# EAGLE board Output_Shield (EAGLE 5.06)
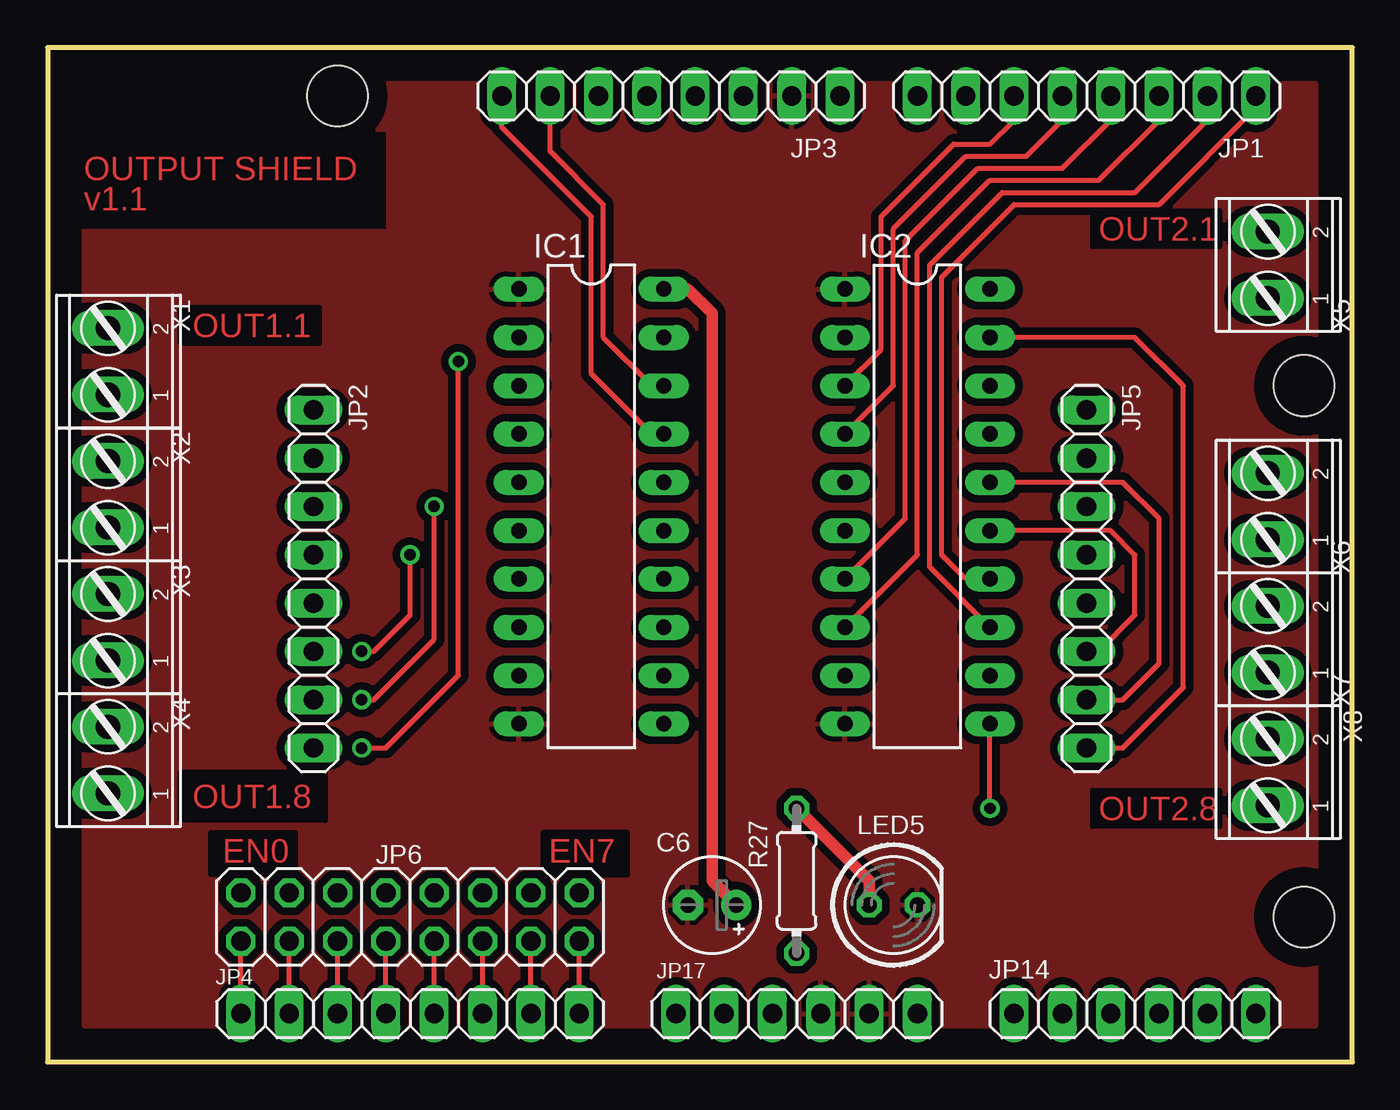
[diagram p0: board, top side]
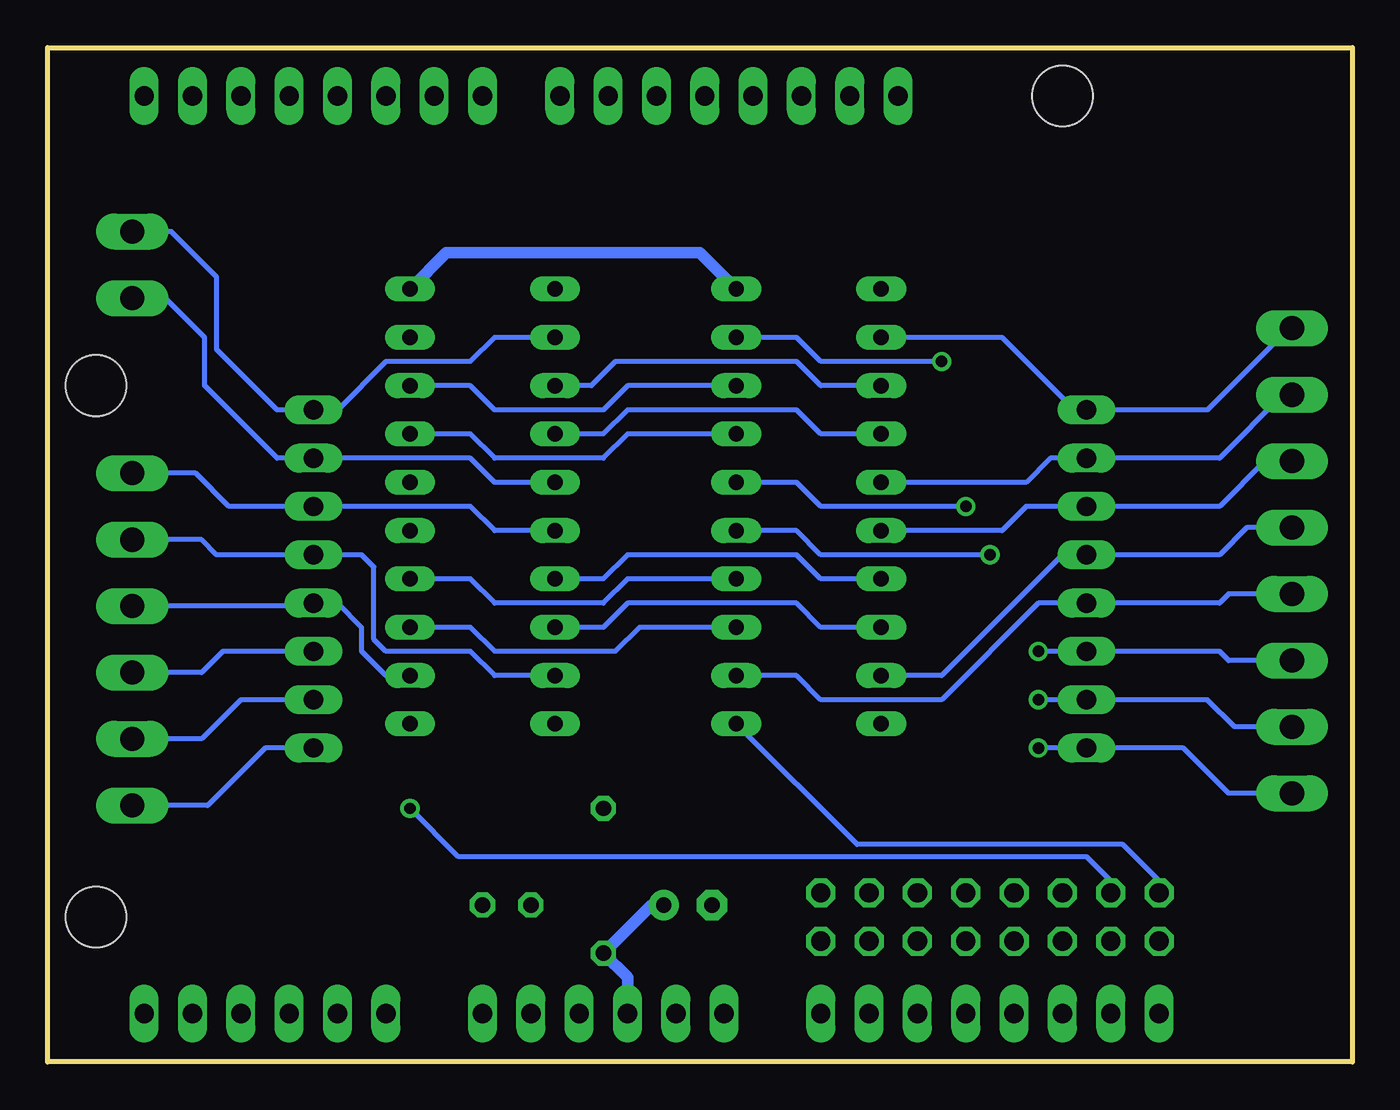
[diagram p1: board, bottom side, seen from below]

Size 68.58 x 53.34 mm. Coordinates in mm from the lower left corner, seen from the top.
Outline: 0,0 68.58,0 68.58,53.34 0,53.34 0,0
Copper layers (1*16): Top 0.035mm / dielectric 1.5mm / Bottom 0.035mm
Design rules "default *": minimum track width 8mil, minimum drill 20mil, track to track 16mil, track to pad 16mil, pad to pad 8mil, via to via 8mil, smd to smd 8mil, copper to edge 40mil, drill to drill 8mil, minimum pad ring 10mil, minimum via ring 8mil, stop-mask expansion 4mil, vias tented up to drill 0mil, thermal gap 10mil
Holes 3.2 mm at 66.04,35.56 66.04,7.62 15.24,50.8
tRestrict: area 0.6,43.8 to 17.8,48.9; area 8.6,9.8 to 13,12.1; area 26,9.8 to 30.5,12.1; area 7,12.7 to 14.6,15.2; area 7,37.8 to 14.3,39.7; area 54.9,42.9 to 61.6,44.8; area 54.9,12.4 to 61.6,14.3

## Footprints (pad centres in the part's own frame; a part is rotated, then mirrored left to right if it is on the bottom)
E2,5-5 = drill 0.813 pad 1.6 round: + -1.27,0 | drill 0.813 pad 1.6 octagon: - 1.27,0
DIL20 = drill 0.813 long: 1 -11.43,-3.81; 2 -8.89,-3.81; 3 -6.35,-3.81; 4 -3.81,-3.81; 5 -1.27,-3.81; 6 1.27,-3.81; 7 3.81,-3.81; 8 6.35,-3.81; 9 8.89,-3.81; 10 11.43,-3.81; 11 11.43,3.81; 12 8.89,3.81; 13 6.35,3.81; 14 3.81,3.81; 15 1.27,3.81; 16 -1.27,3.81; 17 -3.81,3.81; 18 -6.35,3.81; 19 -8.89,3.81; 20 -11.43,3.81
1X08 = drill 1.016 long: 1 -8.89,0; 2 -6.35,0; 3 -3.81,0; 4 -1.27,0; 5 1.27,0; 6 3.81,0; 7 6.35,0; 8 8.89,0
2X08 = drill 1.016 octagon: 1 -8.89,-1.27; 2 -8.89,1.27; 3 -6.35,-1.27; 4 -6.35,1.27; 5 -3.81,-1.27; 6 -3.81,1.27; 7 -1.27,-1.27; 8 -1.27,1.27; 9 1.27,-1.27; 10 1.27,1.27; 11 3.81,-1.27; 12 3.81,1.27; 13 6.35,-1.27; 14 6.35,1.27; 15 8.89,-1.27; 16 8.89,1.27
1X06 = drill 1.016 long: 1 -6.35,0; 2 -3.81,0; 3 -1.27,0; 4 1.27,0; 5 3.81,0; 6 6.35,0
LED5MM = drill 0.813 octagon: A -1.27,0; K 1.27,0
0204/7 = drill 0.813 octagon: 1 -3.81,0; 2 3.81,0
AK550/2 = drill 1.27 long: 1 -1.75,0; 2 1.75,0

## Placement (x,y rotation side)
C6  [E2,5-5]  34.92,8.26 180 top
IC1  74LS374N  [DIL20]  28.57,29.21 270 top
IC2  74LS374N  [DIL20]  45.72,29.21 270 top
JP1  SHIELD_J1  [1X08]  54.61,50.8 0 top
JP2  OUT1  [1X08]  13.97,25.4 270 top
JP3  SHIELD_J3  [1X08]  32.77,50.8 0 top
JP4  IO_J1  [1X08]  19.05,2.54 0 top
JP5  OUT2  [1X08]  54.61,25.4 270 top
JP6  [2X08]  19.05,7.62 180 top
JP14  SHIELD_J2  [1X06]  57.15,2.54 0 top
JP17  POWER  [1X06]  39.37,2.54 0 top
LED5  POWER  [LED5MM]  44.45,8.26 0 top
R27  220  [0204/7]  39.37,9.53 270 top
X1  OUT1  [AK550/2]  3.17,36.83 90 top
X2  OUT2  [AK550/2]  3.17,29.84 90 top
X3  OUT3  [AK550/2]  3.17,22.86 90 top
X4  OUT4  [AK550/2]  3.17,15.88 90 top
X5  OUT5  [AK550/2]  64.14,41.91 90 top
X6  OUT6  [AK550/2]  64.14,29.21 90 top
X7  OUT7  [AK550/2]  64.14,22.23 90 top
X8  OUT8  [AK550/2]  64.14,15.24 90 top

## Library data of the parts
C6 = rcl
IC1 IC2 = 74xx-us
JP1-JP6 JP14 JP17 = pinhead
LED5 = led
R27 = resistor
X1-X8 = con-ptr500+_v5

## Nets
AREF: JP3.8
D0: IC1.3 IC2.3 JP1.3
D1: IC1.4 IC2.4 JP1.4
D2: IC1.7 IC2.7 JP1.5
D3: IC1.8 IC2.8 JP1.6
D4: IC1.13 IC2.13 JP1.7
D5: IC1.14 IC2.14 JP1.8
D6: IC1.17 IC2.17 JP3.1
D7: IC1.18 IC2.18 JP3.2
EN0: JP4.1 JP6.16
EN1: JP4.2 JP6.14
EN2: JP4.3 JP6.12
EN3: JP4.4 JP6.10
EN4: JP4.5 JP6.8
EN5: JP4.6 JP6.6
EN6: JP4.7 JP6.4
EN7: JP4.8 JP6.2
EN_OUT1: IC1.11 JP6.15
EN_OUT2: IC2.11 JP6.13
GND: C6.- IC1.1 IC1.10 IC2.1 IC2.10 JP3.7 JP17.4 JP17.5 LED5.K
MISO: JP3.5
MOSI: JP3.4
N$39: LED5.A R27.1
OUT1.1: IC1.2 JP2.1 X1.2
OUT1.2: IC1.5 JP2.2 X1.1
OUT1.3: IC1.6 JP2.3 X2.2
OUT1.4: IC1.9 JP2.4 X2.1
OUT1.5: IC1.12 JP2.5 X3.2
OUT1.6: IC1.15 JP2.6 X3.1
OUT1.7: IC1.16 JP2.7 X4.2
OUT1.8: IC1.19 JP2.8 X4.1
OUT2.1: IC2.2 JP5.1 X5.2
OUT2.2: IC2.5 JP5.2 X5.1
OUT2.3: IC2.6 JP5.3 X6.2
OUT2.4: IC2.9 JP5.4 X6.1
OUT2.5: IC2.12 JP5.5 X7.2
OUT2.6: IC2.15 JP5.6 X7.1
OUT2.7: IC2.16 JP5.7 X8.2
OUT2.8: IC2.19 JP5.8 X8.1
PC0: JP14.1
PC1: JP14.2
PC2: JP14.3
PC3: JP14.4
PC4: JP14.5
PC5: JP14.6
RESET: JP17.1
RXD: JP1.1
SCK: JP3.6
SS: JP3.3
TXD: JP1.2
VCC: C6.+ IC1.20 IC2.20 JP17.3 R27.2
VCC30: JP17.2
VIN: JP17.6

## Tracks (layer width: path | path; a pad name or v marks a point on that pad's centre or on a via)
D0
  Top 0.254: IC2.3 43.81,37.47 43.81,44.45 47.62,48.26 49.53,48.26 50.8,49.53 JP1.3
  Bottom 0.254: IC2.3 40.01,35.56 38.73,36.83 29.21,36.83 27.94,35.56 IC1.3
D1
  Top 0.254: IC2.4 44.45,35.56 44.45,43.81 48.26,47.62 51.44,47.62 53.34,49.53 JP1.4
  Bottom 0.254: IC2.4 39.37,33.02 38.1,34.29 29.21,34.29 27.94,33.02 IC1.4
D2
  Top 0.254: IC2.7 45.09,28.57 45.09,43.18 48.9,46.99 53.34,46.99 55.88,49.53 JP1.5
  Bottom 0.254: IC2.7 39.37,25.4 38.1,26.67 29.21,26.67 27.94,25.4 IC1.7
D3
  Top 0.254: IC2.8 45.72,26.67 45.72,42.55 49.53,46.35 55.24,46.35 58.42,49.53 JP1.6
  Bottom 0.254: IC2.8 39.37,22.86 38.1,24.13 29.21,24.13 27.94,22.86 IC1.8
D4
  Top 0.254: JP1.7 60.96,49.53 57.15,45.72 50.16,45.72 46.35,41.91 46.35,26.04 IC2.13
  Bottom 0.254: IC2.13 46.35,22.86 45.09,21.59 38.73,21.59 37.47,22.86 IC1.13
D5
  Top 0.254: JP1.8 63.5,50.16 58.42,45.09 50.8,45.09 46.99,41.27 46.99,26.67 48.26,25.4 IC2.14
  Bottom 0.254: IC1.14 38.1,25.4 39.37,24.13 45.09,24.13 46.35,25.4 IC2.14
D6
  Top 0.254: JP3.1 23.88,49.15 28.57,44.45 28.57,36.2 31.75,33.02 IC1.17
  Bottom 0.254: IC2.17 46.35,33.02 45.09,31.75 39.37,31.75 38.1,33.02 IC1.17
D7
  Top 0.254: JP3.2 26.42,47.88 29.21,45.09 29.21,38.1 31.75,35.56 IC1.18
  Bottom 0.254: IC2.18 46.35,35.56 45.09,34.29 39.37,34.29 38.1,35.56 IC1.18
EN0
  Top 0.254: JP4.1 JP6.16
EN1
  Top 0.254: JP4.2 JP6.14
EN2
  Top 0.254: JP4.3 JP6.12
EN3
  Top 0.254: JP4.4 JP6.10
EN4
  Top 0.254: JP4.5 JP6.8
EN5
  Top 0.254: JP4.6 JP6.6
EN6
  Top 0.254: JP4.7 JP6.4
EN7
  Top 0.254: JP4.8 JP6.2
EN_OUT1
  Bottom 0.254: JP6.15 10.16,9.53 12.06,11.43 26.04,11.43 IC1.11
EN_OUT2  (via drill 0.6)
  Top 0.254: v49.53,13.34 IC2.11
  Bottom 0.254: JP6.13 12.7,9.53 13.97,10.79 46.99,10.79 v49.53,13.34
GND
  pour Top: 1.91,1.91 66.67,1.91 66.67,51.44 1.91,51.44
N$39
  Top 0.61: R27.1 43.18,9.53 LED5.A
OUT1.1
  Bottom 0.254: X1.2 3.33,38.58 7.62,34.29 JP2.1 14.61,34.29 18.41,38.1 IC1.2
OUT1.2
  Bottom 0.254: IC1.5 17.14,30.48 15.88,31.75 JP2.2 6.99,31.75 3.65,35.08 X1.1
OUT1.3
  Bottom 0.254: IC1.6 18.41,27.94 17.14,29.21 JP2.3 6.99,29.21 4.6,31.59 X2.2
OUT1.4
  Bottom 0.254: IC1.9 21.59,20.32 15.24,26.67 JP2.4 6.99,26.67 5.56,28.09 X2.1
OUT1.5
  Bottom 0.254: IC1.12 29.21,20.32 27.94,19.05 21.59,19.05 16.51,24.13 JP2.5 6.99,24.13 6.5,24.61 X3.2
OUT1.6  (via drill 0.6)
  Top 0.254: v16.51,21.59 17.14,21.59 19.05,23.5 v19.05,26.67
  Bottom 0.254: IC1.15 29.21,27.94 27.94,26.67 v19.05,26.67 | X3.1 6.5,21.11 6.99,21.59 JP2.6 v16.51,21.59
OUT1.7  (via drill 0.6)
  Top 0.254: v16.51,19.05 17.14,19.05 20.32,22.23 v20.32,29.21
  Bottom 0.254: IC1.16 29.21,30.48 27.94,29.21 v20.32,29.21 | X4.2 6.2,17.62 7.62,19.05 JP2.7 v16.51,19.05
OUT1.8  (via drill 0.6)
  Top 0.254: v16.51,16.51 17.78,16.51 21.59,20.32 v21.59,36.83
  Bottom 0.254: IC1.19 29.21,38.1 27.94,36.83 v21.59,36.83 | X4.1 6.5,14.12 8.89,16.51 JP2.8 v16.51,16.51
OUT2.1
  Bottom 0.254: X5.2 62.08,43.66 59.69,41.27 59.69,37.47 56.52,34.29 JP5.1 53.34,34.29 50.8,36.83 46.35,36.83 45.09,38.1 IC2.2
OUT2.2
  Bottom 0.254: X5.1 62.38,40.16 60.33,38.1 60.33,35.56 56.52,31.75 JP5.2 46.35,31.75 45.09,30.48 IC2.5
OUT2.3
  Bottom 0.254: X6.2 60.8,30.96 59.05,29.21 JP5.3 46.35,29.21 45.09,27.94 IC2.6
OUT2.4
  Bottom 0.254: X6.1 60.48,27.46 59.69,26.67 JP5.4 52.07,26.67 51.44,26.04 51.44,22.23 50.8,21.59 46.35,21.59 45.09,20.32 IC2.9
OUT2.5
  Bottom 0.254: X7.2 54.77,23.98 JP5.5 53.34,24.13 52.07,22.86 52.07,21.59 50.8,20.32 IC2.12
OUT2.6
  Top 0.254: IC2.15 55.88,27.94 57.15,26.67 57.15,23.5 55.24,21.59 JP5.6
  Bottom 0.254: X7.1 60.49,20.48 59.37,21.59 JP5.6
OUT2.7
  Top 0.254: IC2.16 56.52,30.48 58.42,28.57 58.42,20.95 56.52,19.05 JP5.7
  Bottom 0.254: X8.2 60.48,16.99 58.42,19.05 JP5.7
OUT2.8
  Top 0.254: IC2.19 57.15,38.1 59.69,35.56 59.69,19.68 56.52,16.51 JP5.8
  Bottom 0.254: X8.1 60.17,13.49 57.15,16.51 JP5.8
VCC
  Top 0.61: IC1.20 33.66,40.64 34.92,39.37 34.92,9.53 C6.+
  Bottom 0.61: IC2.20 47.62,42.55 34.29,42.55 IC1.20 | C6.+ 36.83,8.26 R27.2 38.1,4.45 JP17.3

## Text on the board
Top: OUTPUT SHIELD | v1.1 | OUT2.1 | OUT1.1 | OUT1.8 | OUT2.8 | EN0 | EN7